# Altium PCB RelayPCB.PcbDoc
Units mm, origin at the board's own origin, x right, y up, seen from the top; angles counter-clockwise.
Board outline 120 x 50 mm, 2 copper layers (Top Layer, Bottom Layer); 87 components, 44 nets, 201 pads, 40 vias.
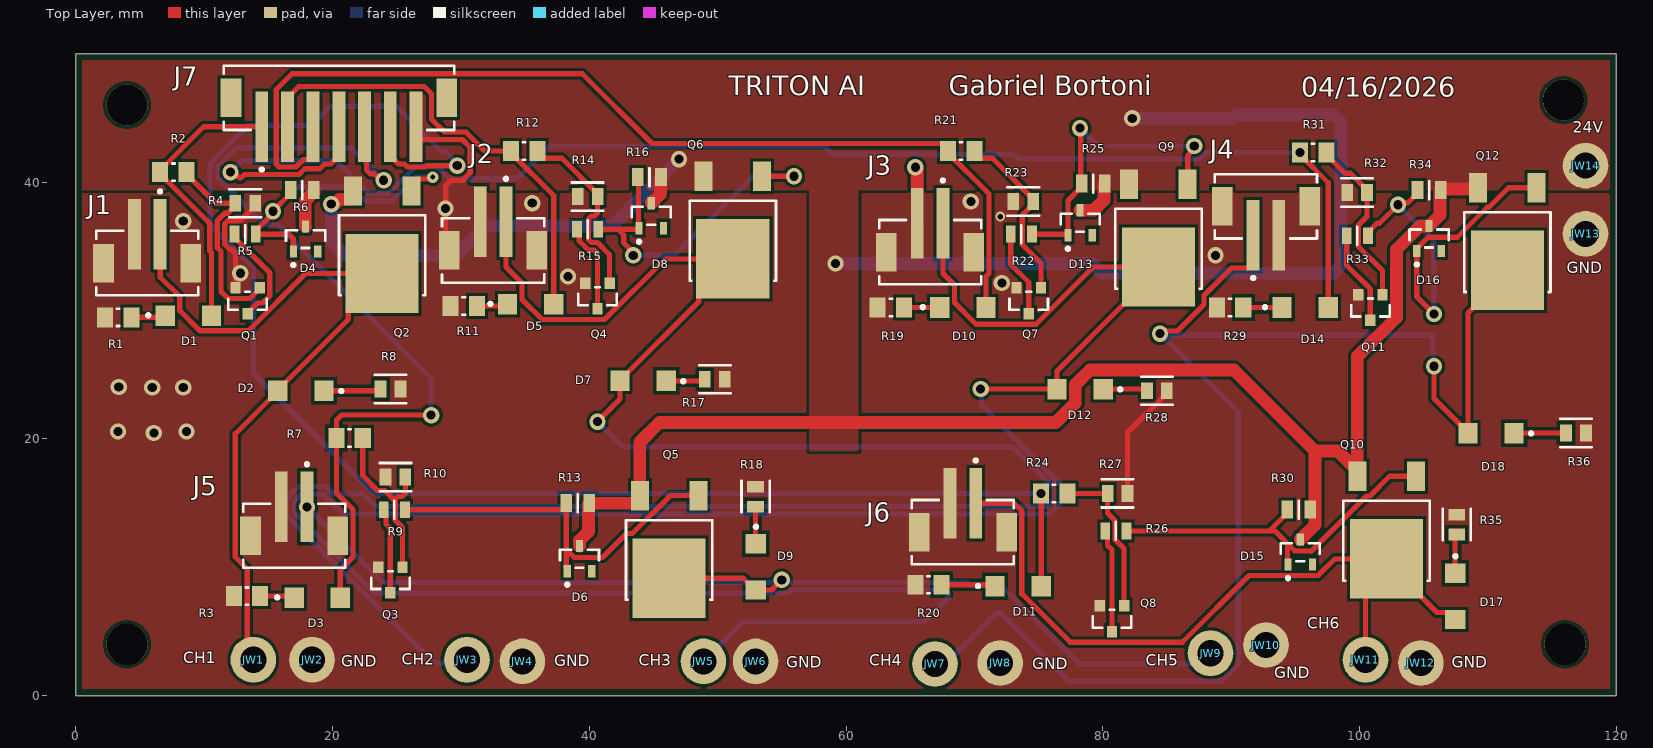
[diagram p0: Top Layer view]
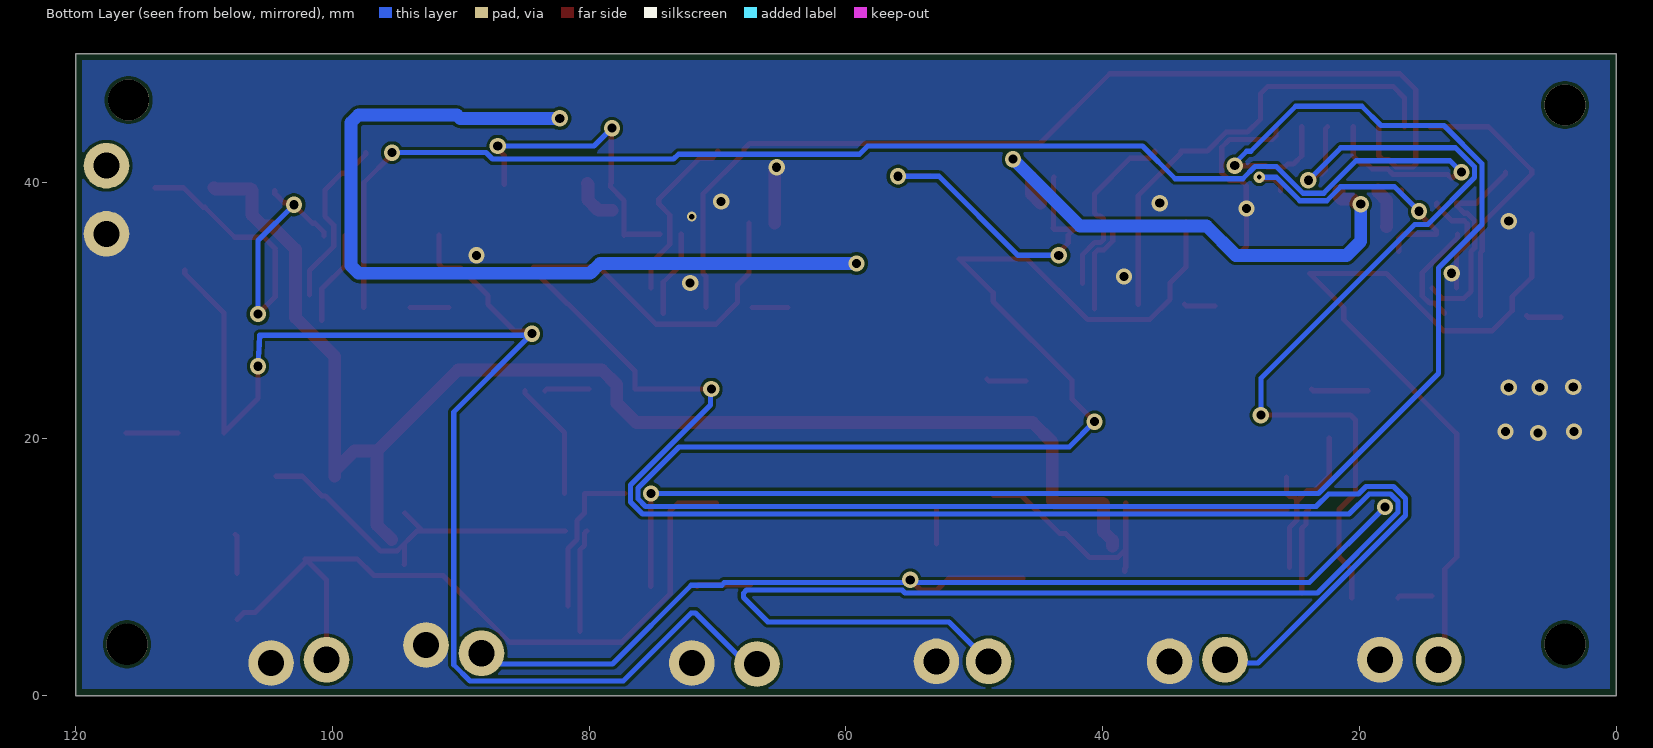
[diagram p1: Bottom Layer view, seen from below]
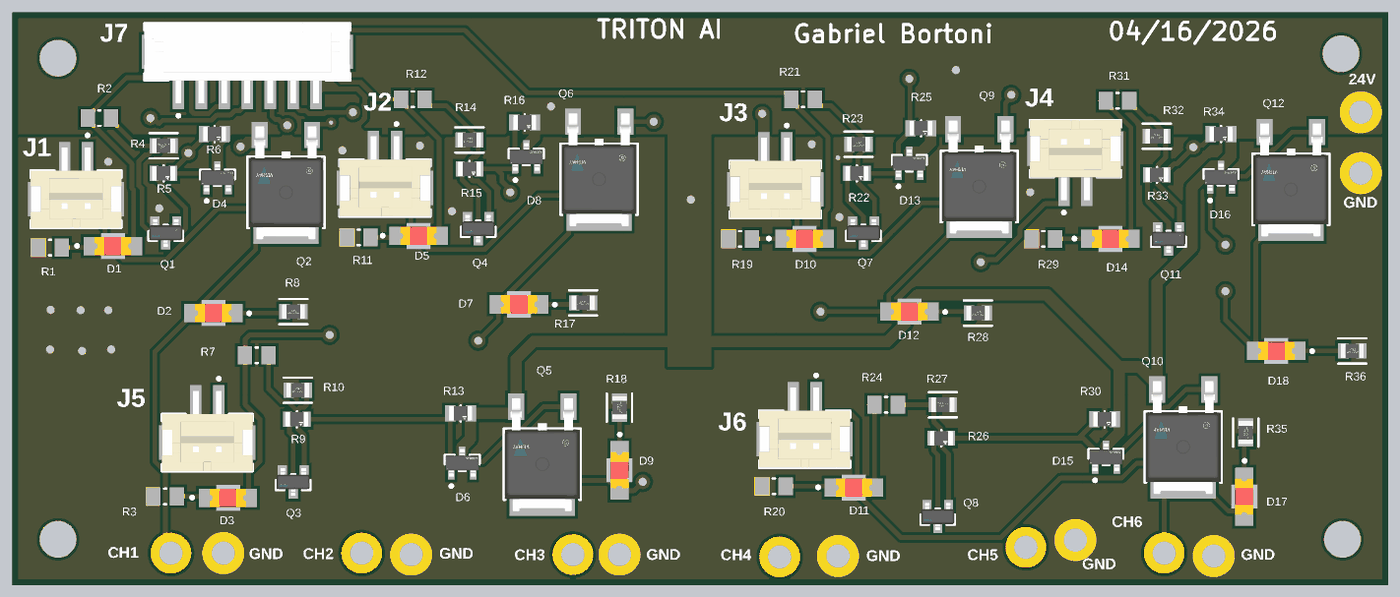
[diagram p2: 3D render of the assembled board from above, using the file's embedded part models]

## Layer stack, top to bottom
Top Solder: solder mask 0.0102, Solder Resist, Dk 3.5
Top Layer: signal copper 0.0356
Dielectric 1: dielectric 0.32, FR-4, Dk 4.8
Bottom Layer: signal copper 0.0356
Bottom Solder: solder mask 0.0102, Solder Resist, Dk 3.5

## Board outline
0,0 0,50 120,50 120,0

## Design rules (kind name [scope] priority, off if disabled: settings)
BoardOutlineClearance [All] p1: gap=0.508 ignorepadtopadclearanceinfootprint=FALSE
Clearance HV [InNetClass('HV')] p1: gap=0.508 ignorepadtopadclearanceinfootprint=TRUE
Clearance POLY_TO_ALL [InPolygon] p2: gap=0.254 ignorepadtopadclearanceinfootprint=TRUE
Clearance ALL_TO_ALL [Not InComponent('U3')] p3: gap=0.178 ignorepadtopadclearanceinfootprint=FALSE except(0: Arc-Hole Track-Hole SMDPad-Hole THPad-Hole Via-Hole Fill-Hole Poly-Hole Region-Hole Text-Hole)
ComponentClearance [All] p1: gap=0.254 collisioncheckmode=3 verticalgap=0.254 showdistances=FALSE donotcheckwithout3dbody=TRUE
HoleSize [Not InComponent('U2')] p1: absolutevalues=TRUE maxlimit=10.16 minlimit=0.305 maxpercent=80.000 minpercent=20.000
MinimumAnnularRing [Not InComponent('U2')] p1: minimumring=0.152
MinimumSolderMaskSliver [All] p1: minsoldermaskwidth=0.05
PlaneClearance [All] p1: clearance=0.381
PlaneConnect [All] p1: pad.planeconnectstyle=Relief pad.reliefexpansion=0.508 pad.reliefentries=4 pad.reliefconductorwidth=0.254 pad.reliefairgap=0.254 via.planeconnectstyle=Direct via.reliefexpansion=0.508 via.reliefentries=4 via.reliefconductorwidth=0.254 via.reliefairgap=0.254
PolygonConnect [All] p1: connectstyle=Direct reliefconductorwidth=0.635 reliefentries=4 polygonreliefangle="90 Angle" airgapwidth=0.254
RoutingVias [Not InComponent('U2')] p1: holewidth=0.254 width=0.508 viastyle="Through Hole" minholewidth=0.152 minwidth=0.508 maxholewidth=0.711 maxwidth=1.27
SilkToSilkClearance [All] p1: silktosilkclearance=0.152
SilkToSolderMaskClearance [IsPad] p1: minsilkscreentomaskgap=0.051 clearancetoexposedcopper=TRUE
SolderMaskExpansion SolderMaskExpansion_1 [IsVia] p1: expansion=0.102 istentingtop=TRUE
SolderMaskExpansion [All] p2: expansion=0.05 istentingtop=FALSE
SupplyNets "Schematic Supply Nets" [InNet('GND')] p1: voltage=0.000
Width [All] p1: maxlimit=2.54 minlimit=0.127 preferedwidth=0.254
Width Width_2A [InNetClass('2A')] p2: maxlimit=2.54 minlimit=0.406 preferedwidth=1.397 minimp=50.000000 maximp=50.000000 favimp=50.000000
Width Width_15A [InNetClass('15A')] p3: maxlimit=25.4 minlimit=6.883 preferedwidth=10.998 minimp=50.000000 maximp=50.000000 favimp=50.000000
Width Width_0.6A [InNetClass('0.6A')] p4: maxlimit=2.54 minlimit=0.127 preferedwidth=0.381 minimp=50.000000 maximp=50.000000 favimp=50.000000
23 further rules are at their usual default settings.

## Components (designator, comment, footprint, x,y, rotation, side; value= is the part's Value field where it differs from the comment)
D1 "LTST-C230EKT" FP-LTST-C230EKT-MFG 8.785,29.591 r0 top (schematic designator D3)
D2 "LTST-C230EKT" FP-LTST-C230EKT-MFG 17.548,23.749 r180 top
D3 "LTST-C230EKT" FP-LTST-C230EKT-MFG 18.818,7.62 r0 top (schematic designator D15)
D4 "BZX84B10LT1G" FP-318-MFG 17.907,35.56 r90 top (schematic designator D1)
D5 "LTST-C230EKT" FP-LTST-C230EKT-MFG 35.433,30.48 r0 top (schematic designator D6)
D6 "BZX84B10LT1G" FP-318-MFG 39.243,10.668 r90 top (schematic designator D13)
D7 "LTST-C230EKT" FP-LTST-C230EKT-MFG 44.196,24.511 r180 top (schematic designator D5)
D8 "BZX84B10LT1G" FP-318-MFG 44.831,37.379 r90 top (schematic designator D4)
D9 "LTST-C230EKT" FP-LTST-C230EKT-MFG 52.959,10.033 r270 top (schematic designator D14)
D10 "LTST-C230EKT" FP-LTST-C230EKT-MFG 69.11,30.226 r0 top (schematic designator D9)
D11 "LTST-C230EKT" FP-LTST-C230EKT-MFG 73.406,8.509 r0 top (schematic designator D18)
D12 "LTST-C230EKT" FP-LTST-C230EKT-MFG 78.232,23.876 r180 top (schematic designator D8)
D13 "BZX84B10LT1G" FP-318-MFG 78.232,36.83 r90 top (schematic designator D7)
D14 "LTST-C230EKT" FP-LTST-C230EKT-MFG 95.758,30.226 r0 top (schematic designator D12)
D15 "BZX84B10LT1G" FP-318-MFG 95.377,11.176 r90 top (schematic designator D16)
D16 "BZX84B10LT1G" FP-318-MFG 105.41,35.601 r90 top (schematic designator D10)
D17 "LTST-C230EKT" FP-LTST-C230EKT-MFG 107.442,7.725 r270 top
D18 "LTST-C230EKT" FP-LTST-C230EKT-MFG 110.236,20.447 r180 top (schematic designator D11)
J1 "B2B-PH-SM4-TB(LF)(SN)" FP-B2B-PH-SM4-TB_LF_SN-MFG 5.572,33.691 r180 top
J2 "B2B-PH-SM4-TB(LF)(SN)" FP-B2B-PH-SM4-TB_LF_SN-MFG 32.512,34.671 r180 top
J3 "B2B-PH-SM4-TB(LF)(SN)" FP-B2B-PH-SM4-TB_LF_SN-MFG 66.548,34.544 r180 top
J4 "B2B-PH-SM4-TB(LF)(SN)" FP-B2B-PH-SM4-TB_LF_SN-MFG 92.71,38.1 r0 top
J5 "B2B-PH-SM4-TB(LF)(SN)" FP-B2B-PH-SM4-TB_LF_SN-MFG 17.018,12.446 r180 top
J6 "B2B-PH-SM4-TB(LF)(SN)" FP-B2B-PH-SM4-TB_LF_SN-MFG 69.104,12.736 r180 top
J7 "B7B-PH-SM4-TBT(LF)(SN)" FP-B7B-PH-SM4-TBT_LF_SN-MFG 20.5,46.55 r0 top
JW1 "WIRE_14AWG" WIRE_14AWG_PTH 13.843,2.794 r0 top (schematic designator JW3)
JW2 "WIRE_14AWG" WIRE_14AWG_PTH 18.415,2.794 r0 top (schematic designator JW4)
JW3 "WIRE_14AWG" WIRE_14AWG_PTH 30.48,2.794 r0 top (schematic designator JW5)
JW4 "WIRE_14AWG" WIRE_14AWG_PTH 34.798,2.667 r0 top (schematic designator JW6)
JW5 "WIRE_14AWG" WIRE_14AWG_PTH 48.895,2.667 r0 top (schematic designator JW7)
JW6 "WIRE_14AWG" WIRE_14AWG_PTH 52.959,2.667 r0 top (schematic designator JW8)
JW7 "WIRE_14AWG" WIRE_14AWG_PTH 66.929,2.467 r0 top (schematic designator JW9)
JW8 "WIRE_14AWG" WIRE_14AWG_PTH 72.009,2.54 r0 top (schematic designator JW10)
JW9 "WIRE_14AWG" WIRE_14AWG_PTH 88.392,3.302 r0 top (schematic designator JW11)
JW10 "WIRE_14AWG" WIRE_14AWG_PTH 92.71,3.937 r0 top (schematic designator JW12)
JW11 "WIRE_14AWG" WIRE_14AWG_PTH 100.457,2.794 r0 top (schematic designator JW13)
JW12 "WIRE_14AWG" WIRE_14AWG_PTH 104.775,2.54 r0 top (schematic designator JW14)
JW13 "WIRE_14AWG" WIRE_14AWG_PTH 117.602,35.966 r0 top (schematic designator JW2)
JW14 "WIRE_14AWG" WIRE_14AWG_PTH 117.602,41.275 r0 top (schematic designator JW1)
Q1 "DMN10H220L-7" FP-SOT23-MFG 13.396,30.75 r270 top (schematic designator Q2)
Q2 "SQD40061EL_GE3" FP-T13-0592-MFG 23.876,34.29 r180 top (schematic designator Q1)
Q3 "DMN10H220L-7" FP-SOT23-MFG 24.511,9.001 r270 top (schematic designator Q10)
Q4 "DMN10H220L-7" FP-SOT23-MFG 40.64,31.115 r270 top
Q5 "SQD40061EL_GE3" FP-T13-0592-MFG 46.228,10.563 r180 top (schematic designator Q9)
Q6 "SQD40061EL_GE3" FP-T13-0592-MFG 51.181,35.433 r180 top (schematic designator Q3)
Q7 "DMN10H220L-7" FP-SOT23-MFG 74.234,30.75 r270 top (schematic designator Q6)
Q8 "DMN10H220L-7" FP-SOT23-MFG 80.711,5.985 r270 top (schematic designator Q12)
Q9 "SQD40061EL_GE3" FP-T13-0592-MFG 84.328,34.798 r180 top (schematic designator Q5)
Q10 "SQD40061EL_GE3" FP-T13-0592-MFG 102.108,12.065 r180 top (schematic designator Q11)
Q11 "DMN10H220L-7" FP-SOT23-MFG 100.838,30.226 r270 top (schematic designator Q8)
Q12 "SQD40061EL_GE3" FP-T13-0592-MFG 111.506,34.544 r180 top (schematic designator Q7)
R1 "CRCW08051K00FKTC" RESC2013X50X30ML20T20 3.311,29.464 r0 top (schematic designator R6)
R2 "CRCW08051K00FKTC" RESC2013X50X30ML20T20 7.611,40.767 r180 top (schematic designator R3)
R3 "CRCW08051K00FKTC" RESC2013X50X30ML20T20 13.344,7.747 r0 top (schematic designator R30)
R4 "CRGP0805F10K" FP-CRGP0805-IPC_C 13.208,38.354 r180 top value=10KΩ
R5 "MCU08050C4302FP500" FP-MCU0805-IPC_C 13.208,35.941 r0 top (schematic designator R2)
R6 "MCU08050C3002FP500" FP-MCU0805-MFG 17.653,39.37 r0 top (schematic designator R1)
R7 "CRCW08051K00FKTC" RESC2013X50X30ML20T20 21.336,20.066 r180 top (schematic designator R27)
R8 "CRGP0805F10K" FP-CRGP0805-IPC_C 24.525,23.876 r0 top value=10KΩ (schematic designator R5)
R9 "MCU08050C4302FP500" FP-MCU0805-IPC_C 24.83,14.478 r0 top (schematic designator R26)
R10 "CRGP0805F10K" FP-CRGP0805-IPC_C 24.906,17.018 r0 top value=10KΩ (schematic designator R29)
R11 "CRCW08051K00FKTC" RESC2013X50X30ML20T20 30.226,30.353 r0 top (schematic designator R12)
R12 "CRCW08051K00FKTC" RESC2013X50X30ML20T20 34.934,42.418 r180 top (schematic designator R9)
R13 "MCU08050C3002FP500" FP-MCU0805-MFG 39.105,14.986 r0 top (schematic designator R25)
R14 "CRGP0805F10K" FP-CRGP0805-IPC_C 39.878,38.862 r0 top value=10KΩ (schematic designator R11)
R15 "MCU08050C4302FP500" FP-MCU0805-IPC_C 39.878,36.322 r0 top (schematic designator R8)
R16 "MCU08050C3002FP500" FP-MCU0805-MFG 44.693,40.386 r0 top (schematic designator R7)
R17 "CRGP0805F10K" FP-CRGP0805-IPC_C 49.784,24.638 r0 top value=10KΩ (schematic designator R10)
R18 "CRGP0805F10K" FP-CRGP0805-IPC_C 52.959,15.494 r90 top value=10KΩ (schematic designator R28)
R19 "CRCW08051K00FKTC" RESC2013X50X30ML20T20 63.491,30.226 r0 top (schematic designator R18)
R20 "CRCW08051K00FKTC" RESC2013X50X30ML20T20 66.421,8.636 r0 top (schematic designator R36)
R21 "CRCW08051K00FKTC" RESC2013X50X30ML20T20 68.97,42.418 r180 top (schematic designator R15)
R22 "MCU08050C4302FP500" FP-MCU0805-IPC_C 73.66,35.941 r0 top (schematic designator R14)
R23 "CRGP0805F10K" FP-CRGP0805-IPC_C 73.801,38.481 r0 top value=10KΩ (schematic designator R17)
R24 "CRCW08051K00FKTC" RESC2013X50X30ML20T20 76.209,15.748 r180 top (schematic designator R33)
R25 "MCU08050C3002FP500" FP-MCU0805-MFG 79.248,39.878 r0 top (schematic designator R13)
R26 "MCU08050C4302FP500" FP-MCU0805-IPC_C 81.026,12.827 r0 top (schematic designator R32)
R27 "CRGP0805F10K" FP-CRGP0805-IPC_C 81.153,15.748 r180 top value=10KΩ (schematic designator R35)
R28 "CRGP0805F10K" FP-CRGP0805-IPC_C 84.215,23.749 r0 top value=10KΩ (schematic designator R16)
R29 "CRCW08051K00FKTC" RESC2013X50X30ML20T20 89.916,30.226 r0 top (schematic designator R24)
R30 "MCU08050C3002FP500" FP-MCU0805-MFG 95.261,14.478 r0 top (schematic designator R31)
R31 "CRCW08051K00FKTC" RESC2013X50X30ML20T20 96.384,42.291 r180 top (schematic designator R21)
R32 "CRGP0805F10K" FP-CRGP0805-IPC_C 99.806,39.187 r0 top value=10KΩ (schematic designator R23)
R33 "MCU08050C4302FP500" FP-MCU0805-IPC_C 99.822,35.814 r0 top (schematic designator R20)
R34 "MCU08050C3002FP500" FP-MCU0805-MFG 105.41,39.37 r0 top (schematic designator R19)
R35 "CRGP0805F10K" FP-CRGP0805-IPC_C 107.569,13.321 r90 top value=10KΩ (schematic designator R34)
R36 "CRGP0805F10K" FP-CRGP0805-IPC_C 116.854,20.447 r0 top value=10KΩ (schematic designator R22)

## Footprints (in the part's own frame and the unit in brackets; to place one, negate y for a bottom-side part, rotate by r counter-clockwise, add the part's x,y. Pads: shape width x height; smd on the part's side, far side on the other; paste and mask are expansions set on the pad)
FP-318-MFG [mm]
  rect 0.95x0.56 smd paste+0 mask+0: 1(-0.975,0.95) 2(-0.975,-0.95) 3(0.975,0)
  silkscreen extent -2.15,-1.52 0.7,1.52, body extent -1.55,-1.62 1.55,1.62, height 0.25
FP-B2B-PH-SM4-TB_LF_SN-MFG [mm]
  rect 1x5.5 smd paste+0 mask+0: 1(-1,-2.25) 2(1,-2.25)
  rect 1.6x3 smd paste+0 mask+0: 3(-3.4,0) 4(3.4,0)
  silkscreen extent -3.98,-5.7 3.98,2.5, body extent -4.3,-5.1 4.3,2.6, height 0.25
FP-B7B-PH-SM4-TBT_LF_SN-MFG [mm]
  rect 1x5.5 smd paste+0 mask+0: 1(-6,-2.25) 2(-4,-2.25) 3(-2,-2.25) 4(0,-2.25) 5(2,-2.25) 6(4,-2.25) 7(6,-2.25)
  rect 1.6x3 smd paste+0 mask+0: 8(-8.4,0) 9(8.4,0)
  silkscreen extent -8.98,-5.7 8.98,2.5, body extent -9.3,-5.1 9.3,2.6, height 0.25
FP-CRGP0805-IPC_C [mm]
  rect 0.906x1.31 smd paste+0 mask+0: 1(-0.776,0) 2(0.776,0)
  silkscreen extent -1.23,-1.1 1.23,1.1, body extent -1.33,-0.8 1.33,0.8, height 0.25
FP-LTST-C230EKT-MFG [mm]
  rect 1.5x1.6 smd paste+0 mask+0: 1(-1.8,0) 2(1.8,0)
  silkscreen extent -3.25,-0.1 -3,0.15, body extent -2.65,-0.95 2.65,0.95, height 0.25
FP-MCU0805-IPC_C [mm]
  rect 0.759x1.308 smd paste+0 mask+0: 1(-0.827,0) 2(0.827,0)
  silkscreen extent 0,-0.7 0,0.7, body extent -1.31,-0.8 1.31,0.8, height 0.25
FP-MCU0805-MFG [mm]
  rect 0.9x1.4 smd paste+0 mask+0: 1(-0.9,0) 2(0.9,0)
  silkscreen extent 0,-0.7 0,0.7, body extent -1.45,-0.8 1.45,0.8, height 0.25
FP-SOT23-MFG [mm]
  rect 0.9x0.8 smd paste+0 mask+0: 1(-1,0.95) 2(-1,-0.95) 3(1,0)
  silkscreen extent -0.7,-1.5 0.7,1.5, body extent -1.55,-1.6 1.55,1.6, height 0.25
FP-T13-0592-MFG [mil]
  rect 55x90 smd paste+0 mask+0: 1(-90,-197.48) 3(90,-197.48)
  rect 224.02x243.31 smd paste+0 mask+0: 4(0,55.87)
  silkscreen extent -132,-122 132,122, body extent -136,-246 136,181, height 10
RESC2013X50X30ML20T20 [mm] "Chip Resistor, 2-Leads, Body 2.00x1.25mm, IPC Low Density"
  rect 1.25x1.55 smd: 1(-1.025,0) 2(1.025,0)
  silkscreen extent -0.1,-0.67 0.1,0.67, body extent -1.1,-0.72 1.1,0.72, height 0.5
WIRE_14AWG_PTH [mil]
  round 140 hole 80: 1(0,0)

## Part data
D1 D2 D3 D5 D7 D9 D10 D11 D12 D14 D17 D18: library part CMP-22017-000030-1, "LED RED CLEAR CHIP SMD", Case Code (Imperial)=1206, Case Code (Metric)=3216, Color=Red, Forward Current=30mA, Forward Voltage=2V, Lens Color=Colorless, Max Operating Temperature=85°C, Min Operating Temperature=-55°C, Package Quantity=1, Power Dissipation=100mW, Reverse Voltage=5V, Test Current=10mA, Case/Package=1206, Depth=1.6mm, Dominant Wavelength=621nm, Height=1.1mm, Illumination Color=Red, Lead Free="Lead Free", Length=3.2mm, Lens Style=Diffused, Lens Transparency=Clear, Luminous Intensity=6mcd, Mount="Surface Mount", Number of Elements=1, Number of LEDs=1, Number of Pins=2, Packaging="Tape and Reel", Power Rating=100mW, Radiation Hardening=No, Viewing Angle=130°, Wavelength=630nm, Width=1.6mm
D4 D6 D8 D13 D15 D16: library part CMP-00278-47358401-1, "BZX84B10LT1G Diode Zener Single 10V 225mW 3-Pin SOT-23 T/R - Tape and Reel", Case/Package=TO-236-3, Manufacturer Lifecycle Status=ACTIVE, Max Junction Temperature (Tj)=150°C, Max Power Dissipation=250mW, Max Reverse Leakage Current=200nA, Min Operating Temperature=-65°C, Reverse Voltage=7V, Test Current=5mA, Tolerance=2%, Zener Voltage=10V, Contact Plating=Tin, Element Configuration=Single, ESD Protection=Yes, Height=1.11mm, Impedance=15Ω, Lead Free="Lead Free", Lifecycle Status=Production, Max Operating Temperature=150°C, Mount="Surface Mount", NexarPartId=47358401, Number of Pins=3, Packaging="Tape & Reel (TR)", Power Dissipation=250mW, RoHS=Compliant, Schedule B=8541100050
J1 J2 J3 J4 J5 J6: library part CMP-2000-05163-2, "CONN HEADER SMD 2POS 2MM", Color=White, Contact Resistance=20mR, Current Rating=2A, Flammability Rating="UL94 V-0", Housing Color=Beige, Insulation Color=Natural, Insulation Resistance=1GR, Max Operating Temperature=85°C, Max Voltage Rating (AC)=100V, Min Operating Temperature=-25°C, Connector Type=Header, Contact Finish - Mating=TIN, Contact Material="Copper Alloy", Contact Mating Length=0.13inch, Contact Plating=Tin, Contact Shape=Square, Contact Type="Male Pin", Depth=5mm, Fastening Type=Detent, Gender=Male, Height=9.4mm, Housing Material=Polyamide, Insulation Material=Nylon, Lead Free="Lead Free", Lead Pitch=2mm, Length=7.95mm, Mated Stacking Heights=8.6mm, Max Current Rating=2A, Mount="Surface Mount", Number of Contacts=2, Number of Poles=2, Number of Positions=2, Number of Rows=1, Orientation=Straight, Packaging="Tape and Reel", Pitch=2mm, REACH SVHC="No SVHC", Series=PH, Termination=Solder, Voltage Rating=100V, Voltage Rating (AC)=100V, Width=5.5mm, Working Voltage=100V
J7: library part CMP-17439-000653-1, "CONN HEADER SMD 7POS 2MM", Lead Free="Lead Free", Mount="Surface Mount", Number of Positions=7, Pitch=2mm, Termination=Crimp
Q1 Q3 Q4 Q7 Q8 Q11: library part CMP-12801-000027-1, "MOSFET N-CH 100V 1.6A SOT-23", Continuous Drain Current=1.4A, Drain To Source Breakdown Voltage=100V, Drain To Source Resistance=250mΩ, Gate To Source Voltage=16V, Input Capacitace At Vds="401pF @ 25V", Manufacturer="Diodes Inc.", Max Forward Diode Voltage=1.2V, Max Junction Temp=+150°C, Package=SOT23, Power Dissipation=1.3W, Pulse Drain Current=8A, Temperature="-55°C to +150°C", Temperature Range Low=-55°C, Typ Forward Diode Voltage=0.7V, Automotive=No, Category=Trans, ComponentLink2Description=Datasheet, ComponentLink2URL=https://www.diodes.com/assets/Datasheets/DMN10H220L.pdf, Depletion Mode=False, Device Class L1="Discrete Semiconductors", Device Class L2=Transistors, Device Class L3=MOSFETs, Digikey Description="MOSFET N-CH 100V 1.6A SOT-23", Drain To Source Voltage=100V, Footprint Url=https://www.diodes.com/assets/Package-Files/SOT23.pdf, Gate Charge At Vgs="8.3nC @ 10V", Height=1.1mm, Lead Free=Yes, Manufacturer Part Number=DMN10H220L-7, Mouser Description="DMN10H220L Series 100 V 250 mOhm N-Channel Enhancement Mode Mosfet - SOT-23", Number Of Channels=1, Number Of N Channels=1, Octopart=https://octopart.com/dmn10h220l-7-diodes+inc.-38898610, Reverse Recovery Charge=9.8nC, Reverse Recovery Time=17ns, RoHS=TRUE, Rthja Max=177°C/W, Standoff Height=0.013mm, Temperature Range High=+150°C, Threshold Vgs Max=2.5V, Threshold Vgs Min=1V, Turn Off Delay Time=7.9ns, Turn On Delay Time=6.8ns
Q2 Q5 Q6 Q9 Q10 Q12: library part CMP-02550-000284-1, "MOSFET P-CH 40V 100A TO252AA"
R1 R2 R3 R7 R11 R12 R19 R20 R21 R24 R29 R31: library part CMP-2001-04268-1, Manufacturer="Vishay Dale", Part Number=CRCW08051K00FKTC
R4 R8 R10 R14 R17 R18 R23 R27 R28 R32 R35 R36: library part CMP-03211-006861-1, "CRGP 0805 10K 1%", Ambient Temperature Range High=+70°C, Manufacturer=TE, Package=CRGP0805, Power Rating=0.33W, Resistance=10KΩ, Temperature="-55°C to +155°C", Temperature Coefficient=±100ppm/°C, Temperature Range High=+155°C, Temperature Range Low=-55°C, Tolerance=0.01, Voltage Rating=150V, Automotive=No, Category=Res, ComponentLink2Description=Datasheet, ComponentLink2URL=https://www.mouser.com/datasheet/2/418/NG_DS_9-1773463-9_A-1358566.pdf, Composition="Thick Film", Device Class L1="Passive Components", Device Class L2=Resistors, Device Class L3="Chip SMD Resistors", Digikey Description="CRGP 0805 10K 1%", Height=0.65mm, Ipc Land Pattern Name=RESC200125X55, Lead Free=Yes, Manufacturer Part Number=CRGP0805F10K, Octopart=https://octopart.com/crgp0805f10k-te+connectivity-91018782, RoHS=TRUE, Series=CRGP
R5 R9 R15 R22 R26 R33: library part CMP-02407-010835-1, "RES 1.05K OHM 0.5% 1/5W 0805", Case/Package=0805, Resistance=43000R, Tolerance=1%, Height=450um, Lead Free="Lead Free", Length=2mm, Width=1.25mm
R6 R13 R16 R25 R30 R34: library part CMP-02407-001702-1, "RES 1.05K OHM 0.5% 1/5W 0805", Case/Package=0805, Max Operating Temperature=125°C, Min Operating Temperature=-55°C, Resistance=30kR, Temperature Coefficient=50ppm/°C, Tolerance=1%, Composition="Thin Film", Contact Plating=Tin, Height=450um, Lead Free="Lead Free", Length=2mm, Radiation Hardening=No, Width=1.25mm

## Free pads (board coordinates)
  round 3.2 hole 3.2: 6(4,46) 7(115.873,46.381) 8(4,4) 9(116,4)

## Via types
v1: diameter 1.27, hole 0.711, Top Layer to Bottom Layer, tented both sides, 38 vias
v2: diameter 0.762, hole 0.427, Top Layer to Bottom Layer, tented both sides, 1 vias
v3: diameter 0.889, hole 0.381, Top Layer to Bottom Layer, tented both sides, 1 vias

## Nets (pads, with @x,y where several pads share a name; then routed paths per layer and width w, separated by ;. In a path a pad name is that pad's centre, name@x,y a point inside that pad or via, vN(x,y) a via of type N, cw(c..) or ccw(c..) an arc to the next point about the centre after c; other vN are vias at no path point)
48V: D4.3 D6.3 D8.3 D13.3 D15.3 D16.3 JW14.1 Q2.3 Q5.3 Q6.3 Q9.3 Q10.3 Q12.3 R6.2 R13.2 R16.2 R25.2 R30.2 R34.2 | length 222.8
  Top Layer w1: D4.3 17.881,36.561 17.881,38.548 18.553,39.22 R6.2 ; v1(19.914,38.278) 19.965,38.329 20.213,38.329 20.546,38.663 21.392,38.663 21.59,38.861 Q2.3 ; D6.3 39.243,12.074 39.955,12.786 39.955,14.936 R13.2 43.744,14.986 43.942,15.184 Q5.3 43.942,19.734 45.473,21.265 76.329,21.265 77.86,22.795 77.86,24.212 79.001,25.354 90.216,25.354 96.52,19.05 ; D8.3 45.543,39.066 45.543,40.336 R16.2 ; D13.3 79.297,37.805 80.098,38.606 80.098,39.828 R25.2 ; D15.3 96.52,13.294 96.52,19.05 ; Q10.3 Q10.3@99.822,17.525 ; Q12.3 109.125,39.465 106.36,39.465 106.31,39.415 R34.2 106.26,39.32 106.26,37.426 D16.3 104.696,36.576 102.866,34.745 102.866,29.445 99.822,26.401 Q10.3@99.822,17.525 ; 96.52,19.05 98.297,19.05 Q10.3@99.822,17.525
  Bottom Layer w1: v1(19.914,38.278) 19.914,35.382 21.006,34.29 29.639,34.29 31.925,36.576 41.783,36.576 v1(46.99,41.783) ; v1(59.182,33.655) 79.158,33.655 79.92,32.893 97.966,32.893 98.552,33.479 98.552,44.626 97.966,45.212 90.295,45.212 90.041,44.958 v1(82.296,44.958)
CH1: D1.2 J7.1 R2.2 | length 22.3
  Top Layer w0.406: D1.2 10.585,34.513 10.453,34.645 10.453,36.75 6.586,40.617 6.586,40.917 9.969,44.3 J7.1
CH2: D5.2 J7.2 R12.2 | length 36.6
  Top Layer w0.406: J7.2 16.5,46.55 17.381,47.431 27.158,47.431 27.719,46.87 27.719,44.892 28.72,43.891 30.381,43.891 31.854,42.418 R12.2 33.909,42.268 37.233,38.944 D5.2
CH3: D10.2 J7.3 R21.2 | length 80.3
  Top Layer w0.406: J7.3 18.5,42.05 18.203,41.753 17.742,41.753 17.158,41.169 15.842,41.169 15.619,41.392 15.619,47.208 16.842,48.431 39.462,48.431 44.903,42.99 67.523,42.99 67.945,42.568 R21.2 ; R21.2@67.945,42.268 71.129,39.084 71.129,32.886 70.91,32.667 D10.2
CH4: D14.2 J7.4 R31.2 | length 112.1
  Top Layer w0.406: v1(12.065,40.767) 12.299,40.767 12.759,40.307 12.862,40.307 13.14,40.585 17.4,40.585 17.85,41.035 19.024,41.035 19.403,41.414 19.864,41.414 20.5,42.05 J7.4 ; R31.2@95.359,42.141 97.558,39.942 D14.2
  Bottom Layer w0.406: v1(12.065,40.767) 12.954,41.656 20.267,41.656 22.797,39.126 24.411,39.126 26.491,41.205 28.155,41.205 29.101,40.259 34.362,40.259 36.902,42.799 58.309,42.799 58.944,42.164 73.053,42.164 73.434,41.783 87.543,41.783 88.051,42.291 v1(95.359,42.291)
CH5: D3.2 J7.5 R7.2 | length 68.8
  Top Layer w0.406: D3.2 20.618,9.807 21.599,10.788 21.599,14.497 20.311,15.785 R7.2 20.311,21.454 20.701,21.844 v1(27.686,21.844) ; J7.5 22.654,44.146 22.654,40.94 22.941,40.653 23.246,40.653 23.757,40.142 v1(23.99,40.142)
  Bottom Layer w0.406: v1(23.99,40.142) 21.458,42.674 12.535,42.674 11.049,41.188 11.049,40.346 14.692,36.703 15.705,36.703 27.686,24.722 v1(27.686,21.844)
CH6: D11.2 J7.6 R24.2 | length 121.2
  Top Layer w0.406: J7.6 24.5,42.05 25.136,41.414 25.597,41.414 25.842,41.169 27.219,41.169 27.325,41.275 v1(29.718,41.275) ; v1(75.184,15.748) 75.206,15.726 D11.2
  Bottom Layer w0.406: v1(29.718,41.275) 29.718,41.463 28.788,42.393 28.473,42.393 24.966,45.9 19.837,45.9 18.339,44.402 13.437,44.402 10.465,41.43 10.465,36.692 13.843,33.314 13.843,25.097 23.192,15.748 v1(75.184,15.748)
GND: J1.2 J1.3 J1.4 J2.2 J2.3 J2.4 J3.2 J3.3 J3.4 J4.2 J4.3 J4.4 J5.2 J5.3 J5.4 J6.2 J6.3 J6.4 J7.7 JW2.1 JW4.1 JW6.1 JW8.1 JW10.1 JW12.1 JW13.1 Q1.2 Q3.2 Q4.2 Q7.2 Q8.2 Q11.2 R1.1 R3.1 R4.1 R8.2 R10.1 R11.1 R14.1 R17.2 R18.2 R19.1 R20.1 R23.1 R27.1 R28.2 R29.1 R32.1 R35.2 R36.2 | length 37.1
  Top Layer w0.406: Q1.2 12.446,34.433 12.098,34.781 11.969,34.781 11.621,35.129 11.621,36.753 11.844,36.976 12.808,36.976 13.984,38.152 R4.1 ; J7.7 26.5,43.604 26.797,43.307 30.139,43.307 30.734,42.712 30.734,40.727 30.139,40.132 29.24,40.132 28.829,39.721 28.829,38.227 28.956,38.1 v1(28.801,37.945) 28.801,34.982 J2.4 ; R27.1 81.929,20.485 84.991,23.547 R28.2
  Top Layer w1: v1(65.405,41.148) 65.405,41.075 65.548,40.932 J3.2
  other v1: 6.096,20.447 3.302,20.574 8.636,20.574 5.969,24.003 8.382,24.003 3.359,24.034 72.136,32.131 38.354,32.639 12.827,32.893 88.773,34.29 8.382,36.957 35.56,38.354 69.723,38.481
  other v2: 72.009,37.313
NetD1_1: D1.1 R1.2 | length 2.7
  Top Layer w0.406: R1.2 6.858,29.464 D1.1
NetD2_1: D2.1 R8.1 | length 4.5
  Top Layer w0.406: D2.1 23.622,23.749 R8.1
NetD3_1: D3.1 R3.2 | length 2.7
  Top Layer w0.406: R3.2 16.891,7.747 D3.1
NetD4_1: D4.1 Q2.1 R5.2 R6.1 | length 25.4
  Top Layer w0.406: R6.1 16.753,39.12 15.367,37.734 v1(15.367,37.719) 15.367,37.548 14.035,36.216 R5.2 16.599,35.941 16.957,35.583 D4.1 ; Q2.1 26.162,39.75 26.657,40.246 27.548,40.246 27.682,40.38 v3(27.813,40.38)
  Bottom Layer w0.406: v1(15.367,37.719) 17.274,39.626 21.471,39.626 22.556,38.542 24.653,38.542 26.491,40.38 v3(27.813,40.38)
NetD5_1: D5.1 R11.2 | length 2.4
  Top Layer w0.406: R11.2 33.506,30.353 D5.1
NetD6_1: D6.1 Q5.1 R9.2 R13.1 | length 30.5
  Top Layer w0.406: R9.2 37.947,14.478 R13.1@38.205,14.736 ; R13.1 38.205,11.387 ; D6.1 38.293,9.888 38.205,9.976 38.205,11.387 ; Q5.1 46.322,15.579 43.358,12.615 42.893,12.615 41.04,10.762 38.83,10.762 38.205,11.387
NetD7_1: D7.1 R17.1 | length 3.1
  Top Layer w0.406: D7.1 48.881,24.511 R17.1
NetD8_1: D8.1 Q6.1 R15.2 R16.1 | length 27.3
  Top Layer w0.406: R15.2 42.254,36.322 ; v1(43.434,34.29) 43.434,34.524 42.694,35.264 42.694,35.882 42.254,36.322 ; R16.1 43.837,40.342 43.837,36.448 D8.1 43.881,36.399 43.804,36.322 42.254,36.322 ; Q6.1 v1(55.943,40.449)
  Bottom Layer w0.406: v1(43.434,34.29) 46.609,34.29 52.768,40.449 v1(55.943,40.449)
NetD9_1: D9.1 R18.1 | length 2.9
  Top Layer w0.406: D9.1 R18.1
NetD10_1: D10.1 R19.2 | length 2.8
  Top Layer w0.406: R19.2 D10.1
NetD11_1: D11.1 R20.2 | length 4.2
  Top Layer w0.406: R20.2 71.479,8.636 D11.1
NetD12_1: D12.1 R28.1 | length 3.5
  Top Layer w0.406: D12.1 83.312,23.876 R28.1
NetD13_1: D13.1 Q9.1 R22.2 R25.1 | length 24.3
  Top Layer w0.406: R22.2 77.205,35.941 77.282,35.864 D13.1 77.282,38.562 78.348,39.628 R25.1 78.29,39.936 78.29,44.138 v1(78.232,44.196) ; Q9.1 86.614,42.057 87.122,42.565 v1(87.122,42.799)
  Bottom Layer w0.406: v1(78.232,44.196) 79.629,42.799 v1(87.122,42.799)
NetD14_1: D14.1 R29.2 | length 3
  Top Layer w0.406: R29.2 D14.1
NetD15_1: D15.1 Q10.1 R26.2 R30.1 | length 29.2
  Top Layer w0.406: R26.2 93.407,12.827 94.949,11.286 94.96,11.286 94.975,11.27 96.258,11.27 100.545,15.557 100.818,15.557 102.342,17.081 Q10.1 ; 92.96,12.827 R30.1@94.361,14.228 ; 94.394,11.84 94.394,10.234 D15.1
NetD16_1: D16.1 Q12.1 R33.2 R34.1 | length 32
  Top Layer w0.406: R33.2 100.649,36.089 101.352,36.792 101.562,36.792 103.162,38.392 103.782,38.392 104.485,39.095 R34.1@104.485,39.345 ; D16.1 104.46,31.049 v1(105.791,29.718) ; D16.1@104.46,34.821 105.334,35.695 107.602,35.695 109.943,38.036 110.076,38.036 111.6,39.56 Q12.1
  Bottom Layer w0.406: v1(102.997,38.227) 105.791,35.433 v1(105.791,29.718)
NetD17_1: D17.1 R35.1 | length 3.1
  Top Layer w0.406: D17.1 107.442,12.418 R35.1
NetD18_1: D18.1 R36.1 | length 4
  Top Layer w0.406: D18.1 R36.1
NetQ1_1: Q1.1 R2.1 R4.2 | length 16.2
  Top Layer w0.406: R2.1 8.636,40.617 10.899,38.354 R4.2 12.432,38.152 11.84,37.56 11.602,37.56 11.037,36.995 11.037,34.887 11.329,34.595 11.329,31.478 11.888,30.919 13.565,30.919 14.346,31.7 Q1.1
NetQ1_3: Q1.3 R5.1 | length 8.3
  Top Layer w0.406: R5.1 12.381,35.666 15.127,32.921 15.127,31.142 14.556,30.572 14.168,30.572 13.396,29.8 Q1.3
NetQ3_1: Q3.1 R7.1 R10.2 | length 13.9
  Top Layer w0.406: R7.1 22.361,17.14 23.519,15.982 24.071,15.982 24.886,15.167 24.886,13.676 25.461,13.101 Q3.1 ; 24.896,15.29 25.119,15.513 25.442,15.513 25.682,15.753 R10.2
NetQ3_3: Q3.3 R9.1 | length 6.7
  Top Layer w0.406: R9.1 24.179,14.302 24.179,13.343 24.511,13.011 Q3.3
NetQ4_1: Q4.1 R12.1 R14.2 | length 14.5
  Top Layer w0.406: R12.1 35.959,42.268 36.381,41.846 37.872,41.846 40.654,39.064 40.64,39.05 40.64,37.597 40.4,37.357 40.168,37.357 39.944,37.134 39.944,35.51 40.168,35.287 40.638,35.287 41.59,34.335 Q4.1
NetQ4_3: Q4.3 R15.1 | length 7.1
  Top Layer w0.406: R15.1 39.227,36.146 39.227,35.401 39.926,34.703 40.396,34.703 40.64,34.459 Q4.3
NetQ7_1: Q7.1 R21.1 R23.2 | length 14.1
  Top Layer w0.406: R21.1 69.995,42.268 70.417,41.846 71.414,41.846 74.577,38.683 R23.2 74.577,38.279 73.726,37.428 73.726,35.129 75.184,33.671 Q7.1
NetQ7_3: Q7.3 R22.1 | length 6.8
  Top Layer w0.406: R22.1 72.833,33.59 74.234,32.189 Q7.3
NetQ8_1: Q8.1 R24.1 R27.2 | length 12.4
  Top Layer w0.406: R24.1 R27.2 80.377,14.222 80.96,13.639 80.96,12.148 81.661,11.446 Q8.1
NetQ8_3: Q8.3 R26.1 | length 8.1
  Top Layer w0.406: R26.1 80.375,12.651 80.375,11.696 80.711,11.36 Q8.3
NetQ11_1: Q11.1 R31.1 R32.2 | length 13.7
  Top Layer w0.406: R31.1 97.409,42.141 98.871,40.679 99.292,40.679 100.582,39.389 R32.2 100.582,37.32 99.888,36.626 99.888,34.999 101.788,33.1 Q11.1
NetQ11_3: Q11.3 R33.1 | length 7.4
  Top Layer w0.406: R33.1 98.995,33.508 100.838,31.665 Q11.3
Out_1: D2.2 J1.1 JW1.1 Q2.4 | length 60.3
  Top Layer w0.406: J1.1 6.594,35.919 6.594,32.581 8.116,31.059 8.116,29.971 9.677,28.41 13.445,28.41 17.906,32.871 Q2.4 21.234,30.229 21.234,29.285 15.748,23.799 D2.2 15.748,23.699 12.437,20.388 12.437,10.788 13.363,9.862 13.363,3.274 JW1.1
Out_2: D7.2 J2.1 JW3.1 Q6.4 | length 162.4
  Top Layer w0.406: J2.1 33.512,33.392 34.764,32.14 34.764,30.86 36.34,29.284 41.198,29.284 45.928,34.014 Q6.4 48.539,31.372 48.539,30.704 42.396,24.561 42.396,23.092 v1(40.64,21.336)
  Bottom Layer w0.406: JW3.1@30.48,2.54 27.911,2.54 16.418,14.033 16.418,15.359 17.355,16.296 19.494,16.296 20.078,15.712 22.402,15.712 23.382,14.732 75.605,14.732 76.2,15.327 76.2,16.169 73.008,19.361 42.615,19.361 v1(40.64,21.336)
Out_3: D12.2 J3.1 JW5.1 Q9.4 | length 192.3
  Top Layer w0.406: J3.1 67.548,32.873 68.441,31.98 68.441,30.606 70.128,28.919 74.792,28.919 79.252,33.379 Q9.4 84.328,33.134 81.686,30.492 81.639,30.492 76.432,25.286 D12.2 v1(70.485,23.876)
  Bottom Layer w0.406: JW5.1 51.971,5.743 66.087,5.743 67.985,7.641 67.985,7.978 67.747,8.216 55.627,8.216 55.412,8.001 23.276,8.001 17.002,14.275 17.002,15.117 17.597,15.712 19.252,15.712 20.816,14.148 75.847,14.148 76.784,15.085 76.784,16.411 70.564,22.631 70.564,23.797 v1(70.485,23.876)
Out_4: D18.2 J4.1 JW7.1 Q12.4 | length 112.4
  Top Layer w0.406: v1(84.455,28.194) 84.665,28.404 85.827,28.404 87.885,30.462 87.885,31.159 90.029,33.303 91.413,33.303 91.71,33.6 J4.1 ; v1(105.791,25.654) 105.791,23.142 108.436,20.497 D18.2 108.436,29.81 111.506,32.88 Q12.4
  Bottom Layer w0.406: JW7.1 67.363,2.901 68.179,2.901 71.714,6.436 72.05,6.436 77.343,1.143 89.286,1.143 90.551,2.408 90.551,22.098 v1(84.455,28.194) 84.582,28.067 105.664,28.067 v1(105.791,25.654)
Out_5: D9.2 J5.1 JW9.1 Q5.4 | length 84.9
  Top Layer w0.406: Q5.4 51.998,9.144 52.909,8.233 D9.2 54.207,8.233 v1(54.991,9.017)
  Bottom Layer w0.406: v1(18.018,14.696) 23.914,8.8 54.991,8.8 68.802,8.8 69.476,8.8 69.679,8.597 72.048,8.597 78.178,2.467 JW9.1@88.392,2.467
Out_6: D17.2 J6.1 JW11.1 Q10.4 | length 58.5
  Top Layer w0.406: J6.1 73.093,14.986 73.695,14.383 73.695,7.931 77.472,4.154 86.191,4.154 91.382,9.345 96.765,9.345 98.066,10.646 Q10.4 ; JW11.1 100.457,8.995 Q10.4@101.986,10.524 ; Q10.4@102.108,10.401 106.037,6.472 106.895,6.472 D17.2
pads on no net: D4.2 D6.2 D8.2 D13.2 D15.2 D16.2 J7.8 J7.9

## Polygon pours and split planes (outlines as drawn)
GND on Top Layer "GND_L01_P002" (solid, pour order 2): 0,0 0,50 120,50 120,0
48V on Top Layer "48V_L01_P000" (solid, pour order 0): 57.15,39.37 57.15,19.05 60.96,19.05 60.96,39.37 119.38,39.37 120,39.99 120,50 0,50 0,39.37
GND on Bottom Layer "GND_L02_P001" (solid, pour order 1): 0,0 0,50 120,50 120,0

## Silkscreen, mask and mechanical layers (free items; w line width, h text height)
Top Overlay:
  text "TRITON AI" at 50.876,46.761 h1.52
  text "Gabriel Bortoni" at 67.996,46.761 h1.52
  text "04/16/2026" at 95.453,46.634 h1.52
  text "24V" at 116.586,43.536 h1.52
  text "GND" at 116.129,32.588 h1.52
  text "CH6" at 95.936,4.902 h1.52
  text "CH1" at 8.382,2.21 h1.52
  text "CH2" at 25.4,2.108 h1.52
  text "CH3" at 43.84,2.007 h1.52
  text "CH4" at 61.824,2.007 h1.52
  text "CH5" at 83.337,2.007 h1.52
  text "GND" at 37.287,1.956 h1.52
  text "GND" at 20.701,1.93 h1.52
  text "GND" at 55.347,1.854 h1.52
  text "GND" at 107.188,1.854 h1.52
  text "GND" at 74.524,1.753 h1.52
  text "GND" at 93.345,1.041 h1.52
Mechanical 1:
  the board outline again, w0.254